# Altium PCB in.PcbDoc
Units mil, origin at the board's own origin, x right, y up, seen from the top; angles counter-clockwise.
Board outline 5991 x 5217 mil, 2 copper layers (Top Layer, Bottom Layer); 20 components, 26 nets, 285 pads, 12 vias.
Unrouted connection lines stored in the file: 6.
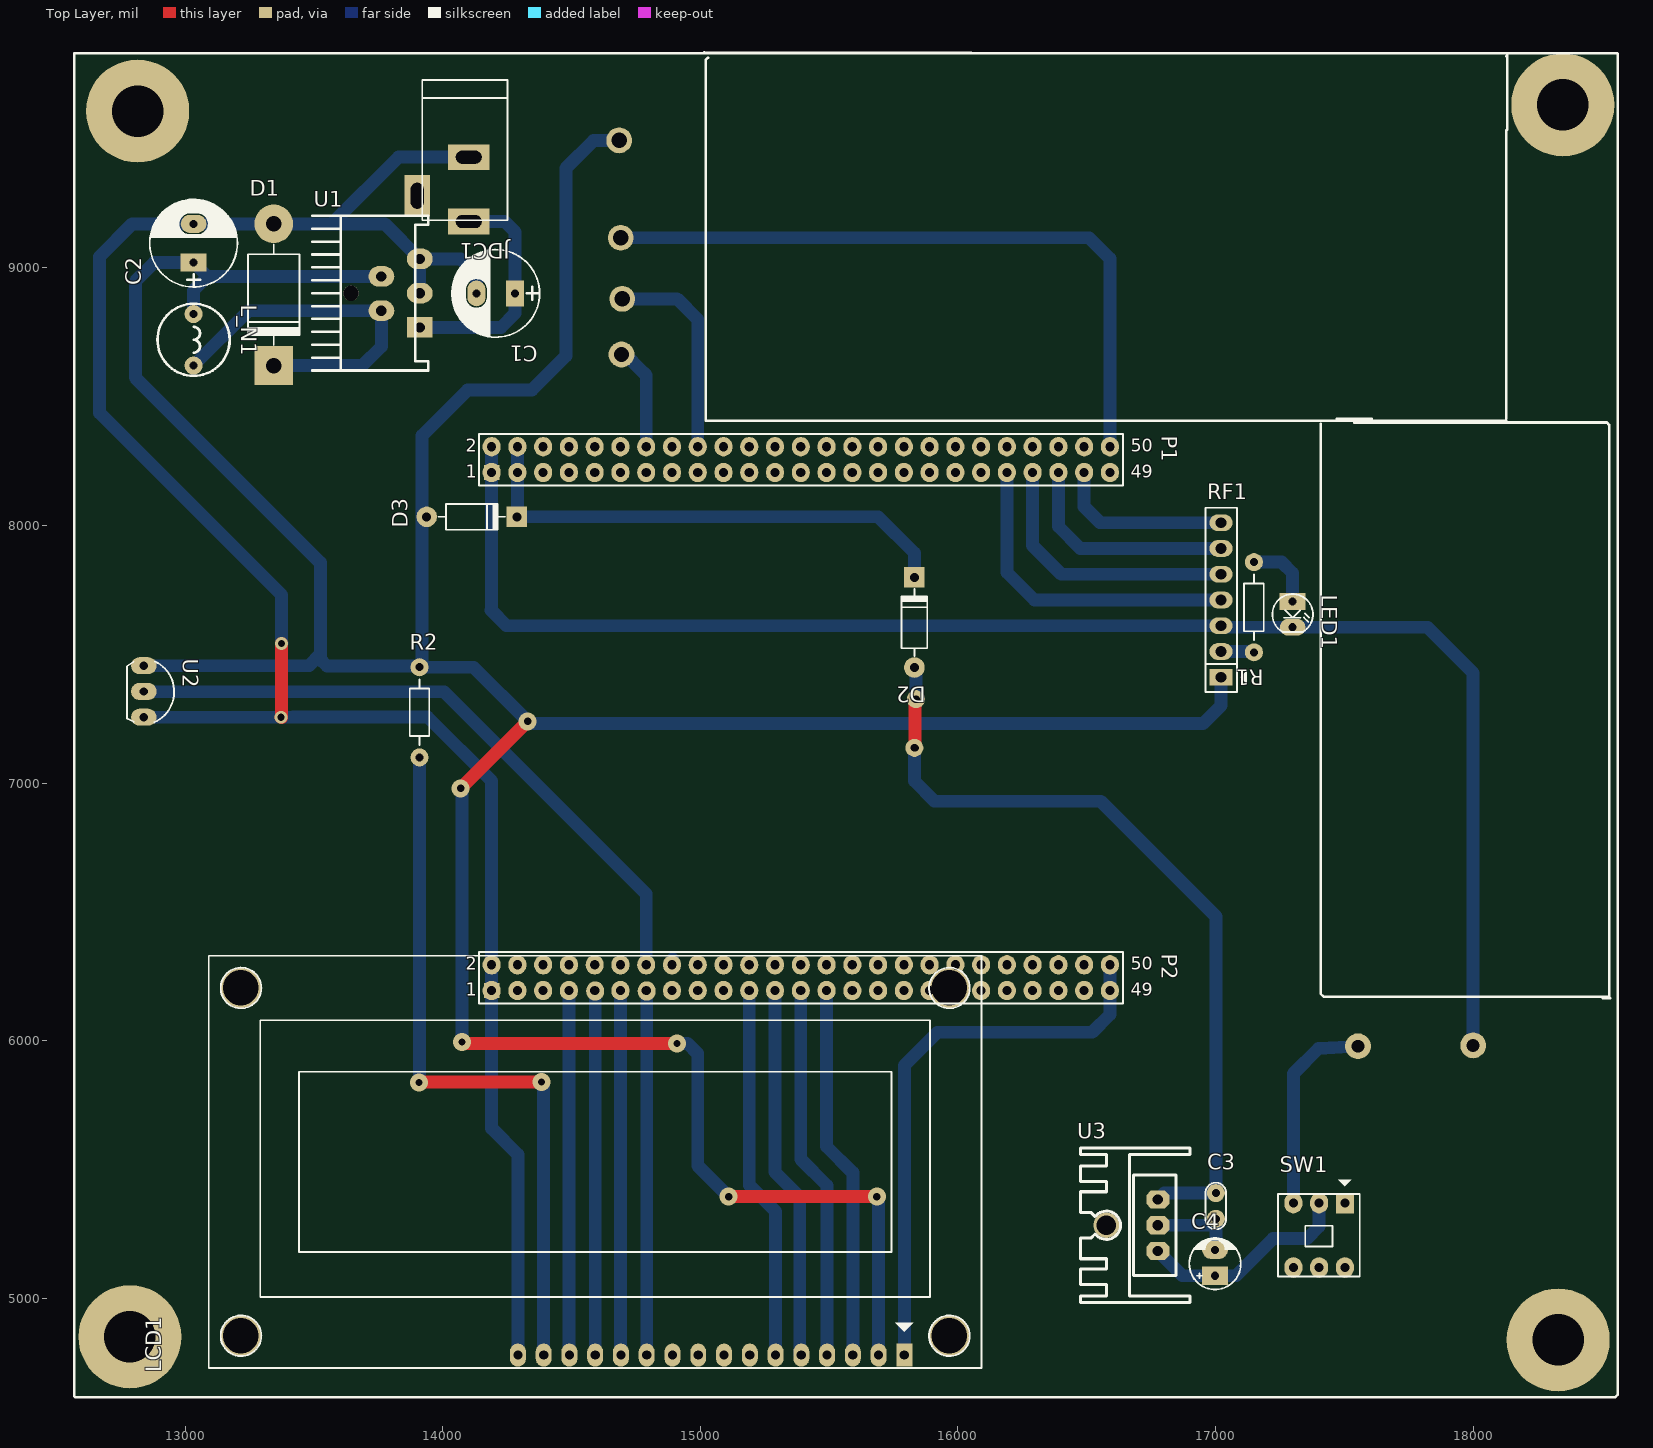
[diagram p0: Top Layer view]
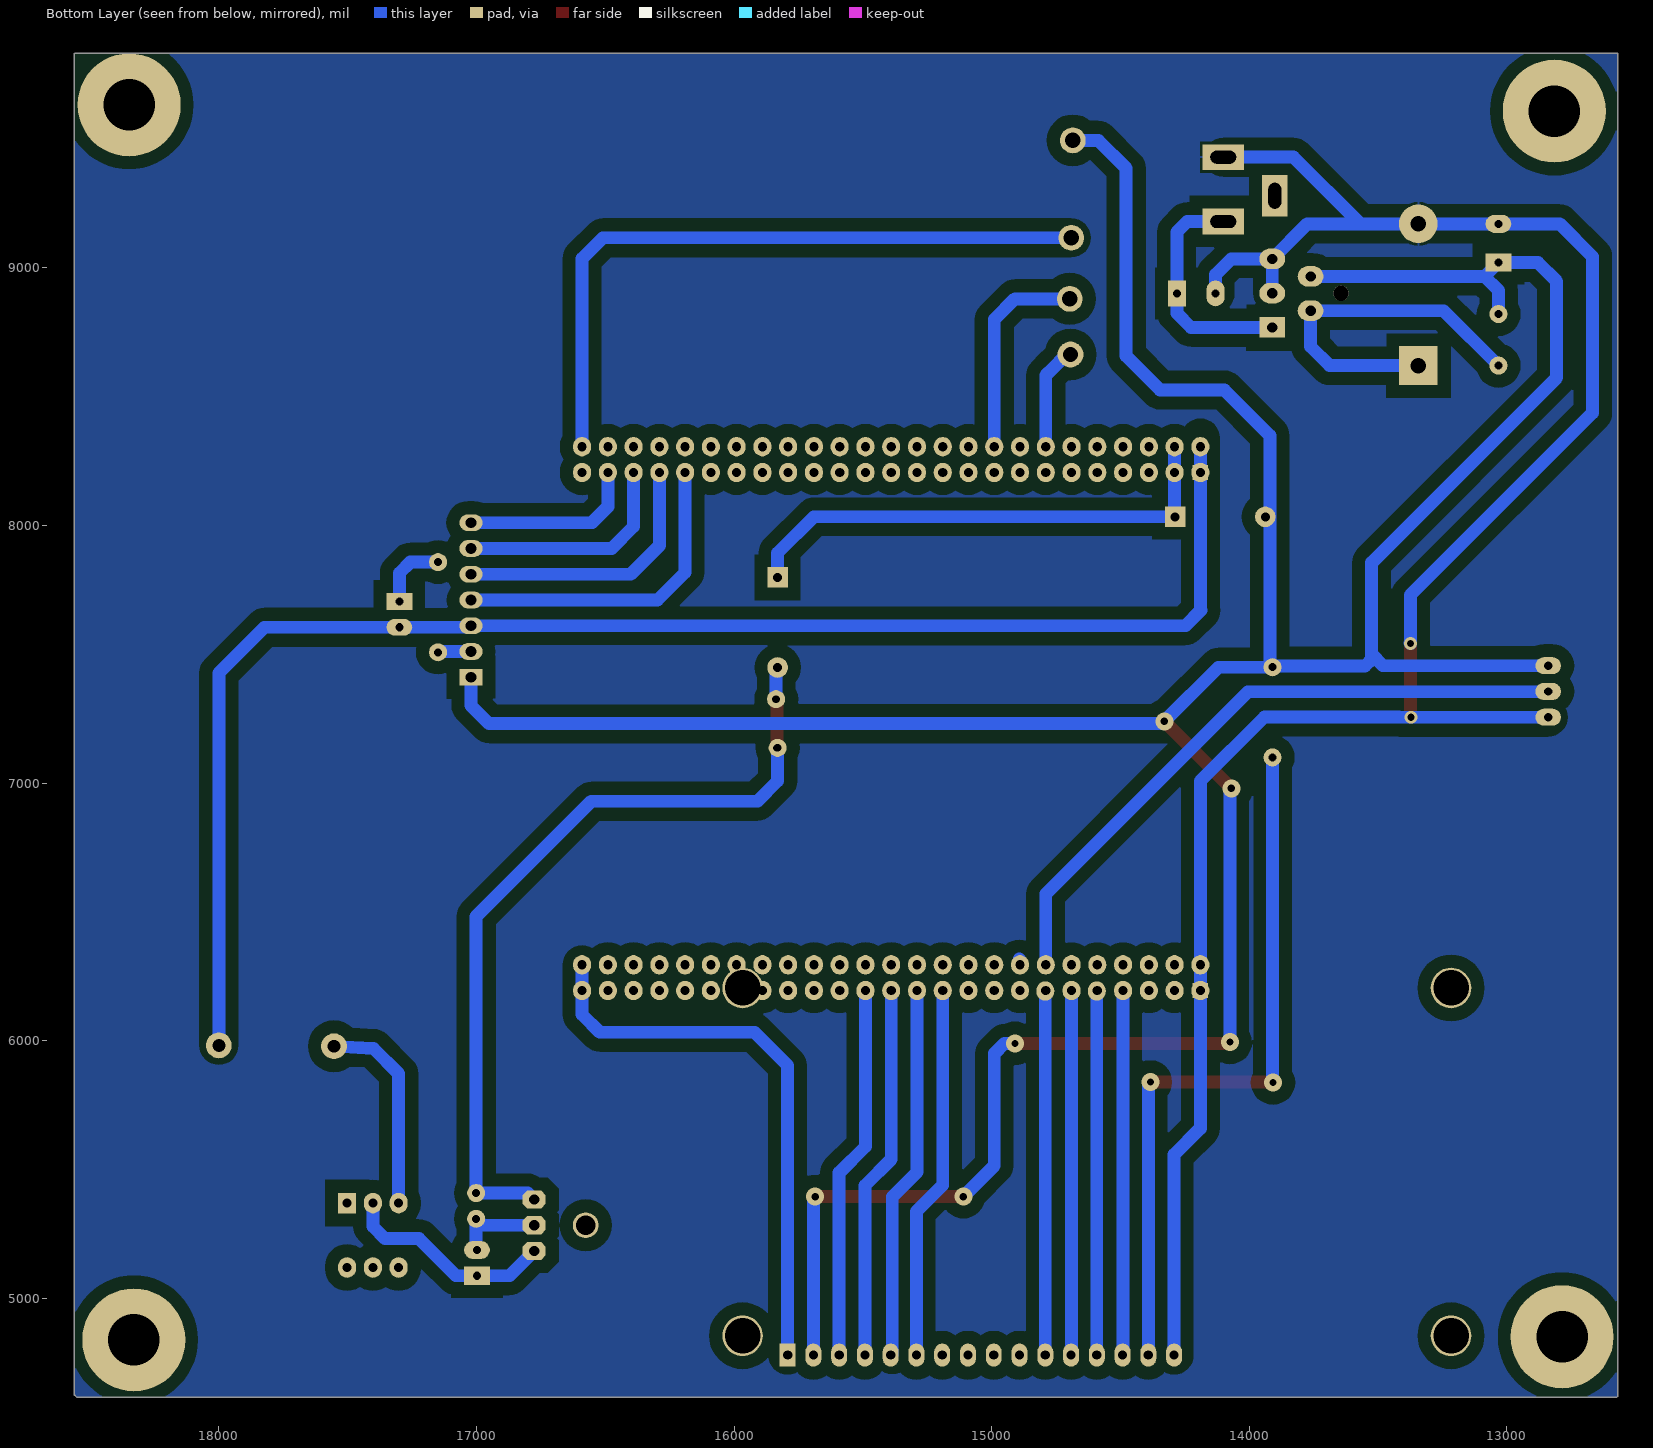
[diagram p1: Bottom Layer view, seen from below]
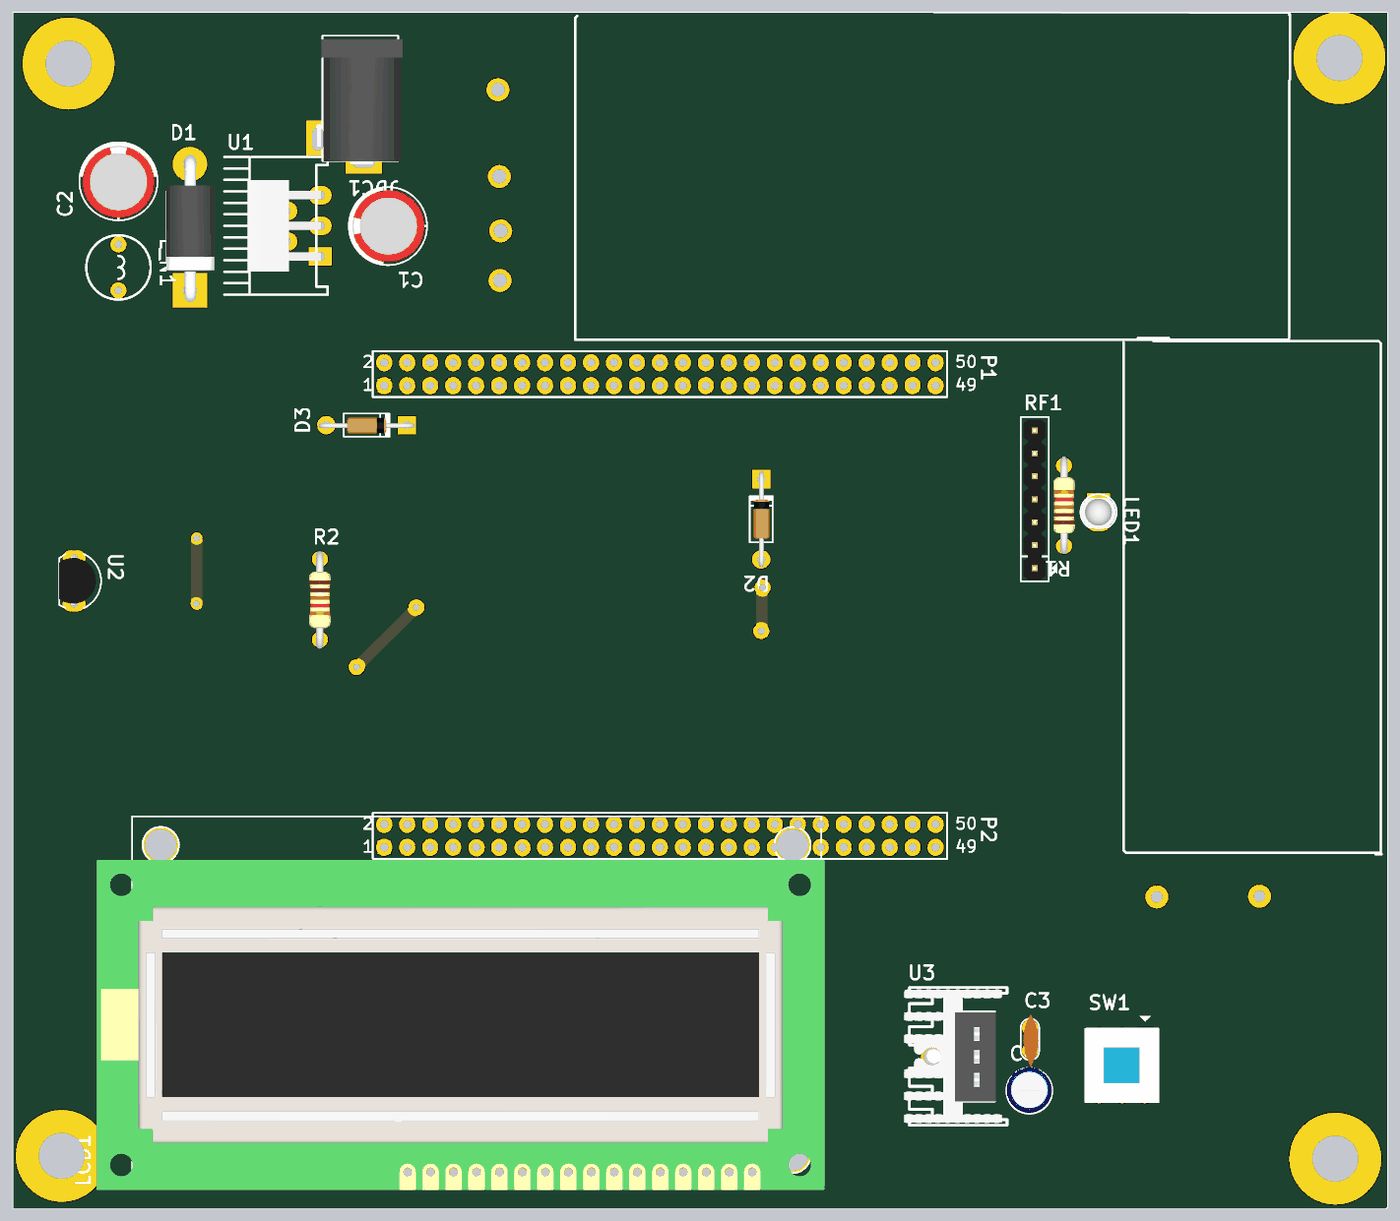
[diagram p2: 3D render of the assembled board from above, using the file's embedded part models]

## Layer stack, top to bottom
Top Solder: solder mask 0.4, Solder Resist, Dk 3.5
Top Layer: signal copper 1.4
Dielectric1: dielectric 12.6, FR-4, Dk 4.8
Bottom Layer: signal copper 1.4
Bottom Solder: solder mask 0.4, Solder Resist, Dk 3.5

## Board outline
12570,4620 12573,4617 18552,4617 18561,4626 18561,9831 18558,9834 12570,9834

## Design rules (kind name [scope] priority, off if disabled: settings)
Clearance [All] p1: gap=10
PolygonConnect [All] p1: connectstyle=Relief reliefconductorwidth=10 reliefentries=4 polygonreliefangle="90 Angle" airgapwidth=10
RoomDefinition nguyenli [InComponentClass('nguyenli')] p1: confinementstyle=ConfineIn formatcopy=TRUE lockcomponents=FALSE outline 0,0 2000,0 2000,1000 0,1000
RoutingVias [All] p1: holewidth=28 width=50 viastyle="Through Hole" minholewidth=28 minwidth=50 maxholewidth=28 maxwidth=50
SilkToSolderMaskClearance SilkscreenOverComponentPads [IsPad] p1: minsilkscreentomaskgap=10 clearancetoexposedcopper=TRUE
SolderMaskExpansion [All] p1: expansion=4
Width [All] p1: maxlimit=100 minlimit=10 preferedwidth=50
29 further rules are at their usual default settings.

## Components (designator, comment, footprint, x,y, rotation, side; value= is the part's Value field where it differs from the comment)
C1 "100uF/35V" CP1.5/3.4 14281,8901 r180 top
C2 "1000uF/16V" CP1.5/3.4 13033,9021 r90 top
C3 "100pF" CN1 17001,5409 r270 top
C4 "10uF" CP1/2 16998,5088 r90 top
D1 "1N5408" D5A 13344,8621 r90 top
D2 "1N4007" D1A 15831,7449 r270 top
D3 "1N4007" D1A 13938,8034 r180 top
JDC1 "Jac DC" DC-IN 14001,9305 r270 top
L_N1 "100uH" 100UH 13033,8721 r270 top
LCD1 "LCD16x2A" LCD16X2 15792,4780 r180 top
LED1 "LED" LED-3 17299,7705 r270 top
P1 "Header 25X2AH" HDR2X25 14190,8206 r0 top
P2 "Header 25X2AH" HDR2X25 14190,6195 r0 top
R1 "220" R1/4W 17149,7858 r270 top
R2 "330" R1/4W 13910,7100 r90 top
RF1 "JP7 PIN" JP7 17021,7411 r90 top
SW1 "SW6" SW6 17502,5370 r270 top
U1 "LM2576T-5.0" LM2576t 13744,8901 r90 top
U2 "LM35" QTO-92 12840,7356 r270 top
U3 "LM7805" QTO-220H3 16776,5184 r90 top

## Footprints (in the part's own frame and the unit in brackets; to place one, negate y for a bottom-side part, rotate by r counter-clockwise, add the part's x,y. Pads: shape width x height; smd on the part's side, far side on the other; paste and mask are expansions set on the pad)
100UH [mil]
  round 70 hole 32: 1(100,0) 2(-100,0)
  silkscreen extent -140,-140 140,140
CN1 [mil]
  round 70 hole 31: 1(0,0) 2(100,0)
  silkscreen extent -40,-40 141,40, body extent -60,-30 170,37, height 265
CP1.5/3.4 [mil] "Tu hoa 220->470uF,16V, 470uF/16V,25V"
  rect 70x100 hole 32: 1(0,0)
  oval 70x100 hole 32: 2(150,0)
  silkscreen extent -95,-170 245,170, body extent -85,-157 230,157, height 446
CP1/2 [mil] "Tu hoa < 22uF/16>50V"
  rect 70x100 hole 32: 1(0,0)
  oval 70x100 hole 32: 2(100,0)
  silkscreen extent -53,-100 146,100, body extent -49,-99 149,99, height 287
D1A [mil] "Diode 1A, W 100mil, L 350mil"
  round 80 hole 35: 1(0,0)
  rect 80x80 hole 35: 2(-350,0)
  silkscreen extent -305,-50 -45,50, body extent -386,-33 34,36, height 84
D5A [mil] "Diode 5A, W 200mil, L 550mil"
  round 150 hole 60: 1(550,0)
  rect 150x150 hole 60: 2(0,0)
  silkscreen extent 80,-100 470,100, body extent -52,-106 590,103, height 254
DC-IN [mil] "Jac DC input"
  rect 100x160 hole 50 slot 100 at 90 deg: 1(125,100) 2(-125,100)
  rect 160x100 hole 50 slot 100 at 0 deg: 3(25,-100)
  silkscreen extent -425,-80 120,250, body extent -410,-105 134,269, height 434
HDR2X25 [mm] "Connector; Header; 25x2 Position"
  rect 1.5x1.5 hole 0.9: 1(0,0)
  round 1.5 hole 0.9: 2(0,2.54) 3(2.54,0) 4(2.54,2.54) 5(5.08,0) 6(5.08,2.54) 7(7.62,0) 8(7.62,2.54) 9(10.16,0) 10(10.16,2.54) 11(12.7,0) 12(12.7,2.54) 13(15.24,0) 14(15.24,2.54) 15(17.78,0) 16(17.78,2.54) 17(20.32,0) 18(20.32,2.54) 19(22.86,0) 20(22.86,2.54) 21(25.4,0) 22(25.4,2.54) 23(27.94,0) 24(27.94,2.54) 25(30.48,0) 26(30.48,2.54) 27(33.02,0) 28(33.02,2.54) 29(35.56,0) 30(35.56,2.54) 31(38.1,0) 32(38.1,2.54) 33(40.64,0) 34(40.64,2.54) 35(43.18,0) 36(43.18,2.54) 37(45.72,0) 38(45.72,2.54) 39(48.26,0) 40(48.26,2.54) 41(50.8,0) 42(50.8,2.54) 43(53.34,0) 44(53.34,2.54) 45(55.88,0) 46(55.88,2.54) 47(58.42,0) 48(58.42,2.54) 49(60.96,0) 50(60.96,2.54)
  silkscreen extent -1.27,-1.27 62.23,3.81, body extent -1.27,-1.27 62.23,3.81, height 1.5
JP7 [mil] "JP7"
  rect 65x90 hole 42: 1(0,0)
  oval 65x90 hole 42: 2(100,0) 3(200,0) 4(300,0) 5(400,0) 6(500,0) 7(600,0)
  silkscreen extent -57,-100 658,60, body extent -50,-49 646,49, height 323
LCD16X2 [mil] "LCD dipslay 16x2, 16 pin"
  rect 62x90 hole 36: 1(0,0)
  oval 62x90 hole 36: 2(100,0) 3(200,0) 4(300,0) 5(400,0) 6(500,0) 7(600,0) 8(700,0) 9(800,0) 10(900,0) 11(1000,0) 12(1100,0) 13(1200,0) 14(1300,0) 15(1400,0) 16(1500,0)
  round 157.48 hole 137.8: "Hole 0"(-175,-75) "Hole 0"(-175,-1425) "Hole 0"(2575,-1425) "Hole 0"(2575,-75)
  silkscreen extent -300,-1550 2700,50, body extent -315,-1360 2855,77, height 414
LED-3 [mil] "LED 2 PIN, 3ly Only colour"
  rect 65x100 hole 32: 1(0,0)
  oval 65x100 hole 32: 2(100,0)
  silkscreen extent -29,-78 118,79, body extent -13,-75 125,75, height 217
LM2576t [mil]
  rect 80x100 hole 40: 1(-132,-167.09)
  oval 80x100 hole 40: 2(-67,-18) 3(1,-167) 4(66,-18) 5(134,-167)
  round 59.06 hole 59.06: ""(1,100)
  silkscreen extent -299,-200 301,250, body extent -199,-175 201,150, height 859
QTO-92 [mil] "TO-92"
  oval 66x100 hole 32: 1(-100,0) 2(0,0) 3(100,0)
  silkscreen extent -117,-65 120,118, body extent -109,-66 109,95, height 245
QTO-220H3 [mil] "TO-220 1-2-3"
  oct 70x90 hole 40: 1(0,0) 2(100,0) 3(200,0)
  round 100 hole 75: 2(100,200)
  silkscreen extent -200,-125 400,300, body extent -190,-102 392,323, height 984
R1/4W [mil] "R 1/4W, 2 Pin, 350mil"
  round 70 hole 31: 1(0,0) 2(350,0)
  silkscreen extent 48,-38 302,38, body extent -40,-47 386,47, height 111
SW6 [mil] "SW DTDP - 6Pin 260x300x300 mil"
  rect 80x70 hole 35: 1(0,0)
  oval 80x70 hole 35: 2(0,-100) 3(0,-200) 4(250,-200) 5(250,-100) 6(250,0)
  silkscreen extent -90,-260 285,58, body extent -33,-259 281,55, height 532

## Part data
C1: library part CP3, "Cap 100uF/35V - 470uF/16V"
C2: library part CP4, "Cap 1000uF/16V - 220uF/50V"
C3: library part CN1, "Cap np  1pF - 472pF"
C4: library part CP1, "Cap P  0,1uF < 22uF , 16 - 50V"
D1: library part D5A, "Diode 5A"
D2 D3: library part D1A, "Diode 1A"
JDC1: library part DCIN, "Jac DC input"
L_N1: library part INDUCTOR1
LCD1: library part LCD16x2, "LCD dipslay 16 char, 2 line"
LED1: "LED Single colour Green and Red"
P1 P2: "Header, 25-Pin, Dual row"
R1 R2: library part R1/4W, "Resistor 1/4W"
RF1: library part JP7
SW1: "SW-DTDP - 6 Pin"
U1: "SIMPLE SWITCHER; 3A Step-Down Voltage Regulator"
U2: "Teminal"
U3: "TO-220"

## Free pads (board coordinates)
  round 100 hole 60: 0(14691,9117) 0(14697,8880) 2(14694,8664) 3(14685,9495)
  round 100 hole 50: 0(17553,5979) 2(18000,5982)
  round 70 hole 30: 1(15837,7326) 2(15831,7137)
  round 400 hole 200: 4(12786,4851) 5(12816,9609) 6(18348,9633) 7(18330,4839)
  oval 70x75 hole 30: 5(14290,8206) 6(14390,8206) 7(14490,8206) 8(14590,8206) 9(14690,8206) 10(14190,8306) 11(14290,8306) 12(14390,8306) 13(14490,8306) 14(14590,8306) 15(14690,8306) 16(14790,8306) 17(14890,8306) 18(14990,8306) 19(15090,8306) 20(15090,8206) 21(14990,8206) 22(14890,8206) 23(14790,8206) 24(15190,8306) 25(15190,8206) 26(15290,8306) 27(15290,8206) 28(15390,8206) 29(15390,8306) 30(15490,8306) 31(15490,8206) 32(15590,8306) 33(15590,8206) 34(15690,8206) 35(15690,8306) 36(15790,8306) 37(15790,8206) 38(15890,8206) 39(15890,8306) 40(15990,8306) 41(15990,8206) 42(16090,8206) 43(16090,8306) 44(16190,8306) 45(16190,8206) 46(16290,8206) 47(16290,8306) 48(16390,8306) 49(16490,8306) 50(16590,8306) 51(16490,8206) 52(16390,8206) 53(16590,8206) 54(14190,8206) 55(16190,8206) 56(16290,8206) 57(16390,8206) 58(14190,6295) 59(14190,6195) 60(14290,6195) 61(14290,6295) 62(14390,6295) 63(14390,6195) 64(14490,6195) 65(14490,6295) 66(14590,6295) 67(14592,6193) 68(14690,6195) 69(14690,6295) 70(14790,6295) 71(14792,6193) 72(14890,6195) 73(14890,6295) 74(14990,6295) 75(14990,6195) 76(15090,6295) 77(15090,6195) 78(15190,6195) 79(15190,6295) 80(15290,6295) 81(15290,6195) 82(15390,6195) 83(15390,6295) 84(15490,6295) 85(15490,6195) 86(15590,6195) 87(15590,6295) 88(15690,6295) 89(15690,6195) 90(15790,6195) 91(15790,6295) 92(15890,6295) 93(15890,6195) 94(15990,6295) 95(16090,6195) 96(16090,6295) 97(16190,6295) 98(16190,6195) 99(16290,6195) 100(16290,6295) 101(16590,6295) 102(16490,6295) 103(16390,6295) 104(16390,6195) 105(16490,6195) 106(16590,6195)

## Via types
v1: diameter 70, hole 28, Top Layer to Bottom Layer, 8 vias
v2: diameter 50, hole 28, Top Layer to Bottom Layer, 4 vias

## Nets (pads, with @x,y where several pads share a name; then routed paths per layer and width w, separated by ;. In a path a pad name is that pad's centre, name@x,y a point inside that pad or via, vN(x,y) a via of type N, cw(c..) or ccw(c..) an arc to the next point about the centre after c; other vN are vias at no path point)
3V: P1.5 P1.6 pad.6@14390,8206 pad.12
5V: C2.1 D3.1 L_N1.2 LCD1.2 pad.3 R2.2 RF1.1 U1.4 U2.1 | length 14056
  Top Layer w50: v1(14070,6980) v1(14330,7240) ; v1(14075,5995) 14080,5990 v1(14910,5990) ; v1(15110,5395) v1(15685,5395)
  Bottom Layer w50: U2.1 13481,7456 13525,7500 ; L_N1.2 13033,8913 13087,8967 ; U1.4 13087,8967 ; D3.1 D3.1@13920,8034 ; v1(14070,6980) 14075,6975 v1(14075,5995) ; pad.3 14586,9495 14478,9387 14478,8658 14346,8526 14097,8526 13920,8349 D3.1@13920,8034 ; v1(14910,5990) 14950,5990 14990,5950 14990,5515 v1(15110,5395) ; v1(15685,5395) 15692,5388 LCD1.2 ; RF1.1 17021,7301 16951,7231 14339,7231 v1(14330,7240) 14120,7450 R2.2 ; 13087,8967 C2.1 12880,9021 12807,8948 12807,8574 13525,7856 13525,7500 ; 13525,7500 13525,7481 13551,7455 13905,7455 R2.2 ; R2.2 13920,7460 D3.1@13920,8034
D4: LCD1.11 P2.13 pad.71 | length 1418.7
  Bottom Layer w50: LCD1.11@14790,4782 LCD1.11 pad.71 P2.13
D5: LCD1.12 P2.11 pad.68 | length 1415.8
  Bottom Layer w50: P2.11 14690,4782 LCD1.12
D6: LCD1.13 P2.9 pad.67 | length 1418.7
  Bottom Layer w50: LCD1.13@14590,4782 LCD1.13 pad.67 P2.9
D7: LCD1.14 P2.7 pad.64 | length 1415.8
  Bottom Layer w50: P2.7 14490,4782 LCD1.14
EN: LCD1.6 P2.21 pad.78 | length 1457.2
  Bottom Layer w50: P2.21 15190,5440 15292,5338 LCD1.6
GND: C1.2 C2.2 D1.1 JDC1.2 LCD1.1 LCD1.5 LCD1.16 LED1.2 P1.1 P1.2 P2.1 P2.2 P2.23 P2.49 P2.50 pad.0@14691,9117 pad.2@18000,5982 pad.10 pad.54 pad.58 pad.59 pad.81 pad.101 pad.106 RF1.3 U1.3 U1.5 U2.3 | length 17899.1
  Top Layer w50: v2(13372,7256) 13374,7254 v2(13374,7542)
  Bottom Layer w50: U2.3 v2(13372,7256) 13419,7256 13420,7257 13941,7257 14190,7008 P2.2 P2.1 14190,5660 14292,5558 LCD1.16 ; v2@13376,7544 v2(13374,7542) 13374,7731 12667.5,8437.5 12667.5,9043.5 12795,9171 C2.2 D1.1 13569,9171 ; U1.3 U1.5 ; JDC1.2 13828,9430 13569,9171 ; C1.2 14131,8974 14070,9035 U1.5 ; P1.2 P1.1 14190,7673 14188,7671 14248,7611 RF1.3 17027,7605 LED1.2 17823,7605 18000,7428 pad.2@18000,5982 ; P2.23 15290,5490 15386,5394 LCD1.5@15386,4782 ; LCD1.1 15792,5904 15921,6033 16521,6033 16590,6102 P2.49 P2.50 ; 13569,9171 13775,9171 U1.5
LM35: P2.14 pad.70 U2.2 | length 2531.6
  Bottom Layer w50: U2.2 12841,7355 14005,7355 14790,6570 P2.14@14790,6314
NetC1_1: C1.1 JDC1.1 U1.1 | length 905.3
  Bottom Layer w50: U1.1 14226,8769 14281,8824 C1.1 14281,9140 14241,9180 JDC1.1
NetC3_1: C3.1 D2.1 pad.1 pad.2@15831,7137 U3.3 | length 3136.1
  Top Layer w50: v2(15834,7137) 15834,7323 v2(15837,7326)
  Bottom Layer w50: v2(15834,7137) 15831,7137 15831,7008 15909,6930 16554,6930 17001,6483 C3.1 16801,5409 U3.3 ; v2(15837,7326) D2.1@15837,7443
NetC3_2: C3.2 C4.2 U3.2 | length 353.4
  Bottom Layer w50: U3.2@16776,5284 16976,5284 C3.2 C4.2@17001,5191
NetC4_1: C4.1 SW1.2 U3.1 | length 835.9
  Bottom Layer w50: U3.1 16872,5088 C4.1 17079,5088 17223,5232 17355,5232 17402,5279 SW1.2
NetD1_2: D1.2 L_N1.1 U1.2 | length 1404.9
  Bottom Layer w50: L_N1.1 13246,8834 U1.2 13762,8695 13688,8621 D1.2
NetLCD1_15: LCD1.15 R2.1 | length 2803
  Top Layer w50: v1(13908,5838) 13910,5840 v1(14384,5840)
  Bottom Layer w50: v1(13908,5838) 13910,5840 R2.1 ; v1(14384,5840) 14392,5832 LCD1.15
NetLED1_1: LED1.1 R1.1 | length 278.4
  Bottom Layer w50: R1.1 17257,7858 17299,7816 LED1.1
PIN: SW1.1
RF1: P1.41 pad.45 pad.55 RF1.4 | length 1263.3
  Bottom Layer w50: P1.41 16190,7818 16297,7711 RF1.4
RF2: P1.43 pad.46 pad.56 RF1.5 | length 1061
  Bottom Layer w50: P1.43 16290,7922 16401,7811 RF1.5
RF3: P1.45 pad.52 pad.57 RF1.6 | length 876.2
  Bottom Layer w50: P1.45 16390,7996 16475,7911 RF1.6
RF4: P1.47 pad.51 RF1.7 | length 689.7
  Bottom Layer w50: P1.47 16490,8073 16552,8011 RF1.7
RS: LCD1.4 P2.25 pad.82 | length 1457.2
  Bottom Layer w50: P2.25 15390,5540 15492,5438 LCD1.4
SS: P2.16 pad.73 | length 4.2
  Bottom Layer w50: P2.16@14890,6314 P2.16@14893,6317
VDK: D2.2 D3.2 P1.3 P1.4 pad.5@14290,8206 pad.11 | length 1956.2
  Bottom Layer w50: P1.4 P1.3 14290,8036 D3.2 15690,8034 15831,7893 D2.2@15831,7811
VSS: LCD1.3 P2.27 pad.85 | length 1457.2
  Bottom Layer w50: P2.27 15490,5590 15592,5488 LCD1.3
VT: R1.2 RF1.2 | length 129.2
  Bottom Layer w50: RF1.2 17146,7511 R1.2
pads on no net: "LCD1.Hole 0" JDC1.3 LCD1.7 LCD1.8 LCD1.9 LCD1.10 P1.7 P1.8 P1.9 P1.10 P1.11 P1.12 P1.13 P1.14 P1.15 P1.16 P1.17 P1.18 P1.19 P1.20 P1.21 P1.22 P1.23 P1.24 P1.25 P1.26 P1.27 P1.28 P1.29 P1.30 P1.31 P1.32 P1.33 P1.34 P1.35 P1.36 P1.37 P1.38 P1.39 P1.40 P1.42 P1.44 P1.46 P1.48 P1.49 P1.50 P2.3 P2.4 P2.5 P2.6 P2.8 P2.10 P2.12 P2.15 P2.17 P2.18 P2.19 P2.20 P2.22 P2.24 P2.26 P2.28 P2.29 P2.30 P2.31 P2.32 P2.33 P2.34 P2.35 P2.36 P2.37 P2.38 P2.39 P2.40 P2.41 P2.42 P2.43 P2.44 P2.45 P2.46 P2.47 P2.48 SW1.3 SW1.4 SW1.5 SW1.6 U1.
copper on no net: | length 4706.1
  Bottom Layer w50: 14682,8883 14685,8880 14805,8880 ; 14691,9117 14776,9117 16509,9117 16590,9036 16590,8306 ; 14718,8655 14763.1,8609.9 14790,8583 14790,8306 ; 14779,8880 14910,8880 14990,8800 14990,8306 ; 15589,6194 15590,6195 ; 15685,6190 15690,6195 ; 17302,5370 17302,5872 17400,5970 17553,5979

## Polygon pours and split planes (outlines as drawn)
GND on Bottom Layer "Top Layer-No Net" (solid, pour order 3): 12570,9834 12571.5,9832.5 18559.5,9832.5 18559.5,4624.5 18556.5,4621.5 18552,4617 12573,4617 12573,9831 12570,9834

## Silkscreen, mask and mechanical layers (free items; w line width, h text height)
Top Overlay:
  lines w10: 15015,9837 18132,9831 ; 15021,9498 15021,9807 15030,9816 ; 15021,9519 15021,8406 18129,8406 ; 17408,8395.54 17408,6182.54 17419.54,6171 18528,6171 ; 17471,8413.54 17605.54,8413.54 ; 17538,8400 18519,8400 18528,8391 18528,6168 18531,6165 18504,6165 ; 18129,8415 18129,9534 ; 18129,9822 18132,9825 18132,9537 ; 12570,4620 12570,9834 18558,9834 18561,9831 18561,4626 18552,4617 12573,4617 12570,4620

## Text inside footprints (layer, text, board x,y; h text height)
P1: Top Overlay "2" at 14090,8286 h50; Top Overlay "1" at 14090,8186 h50; Top Overlay "49" at 16670,8186 h50; Top Overlay "50" at 16670,8286 h50
P2: Top Overlay "2" at 14090,6275 h50; Top Overlay "1" at 14090,6175 h50; Top Overlay "49" at 16670,6175 h50; Top Overlay "50" at 16670,6275 h50